# Altium PCB PCB1.PcbDoc (part 1 of 4)
Units mm, origin at the board's own origin, x right, y up, seen from the top; angles counter-clockwise.
Board outline 27.87 x 27.34 mm, 4 copper layers (Top Layer, Mid-Layer 1, Mid-Layer 2, Bottom Layer); 8 components, 11 nets, 32 pads, 618 vias.
Unrouted connection lines stored in the file: 1.
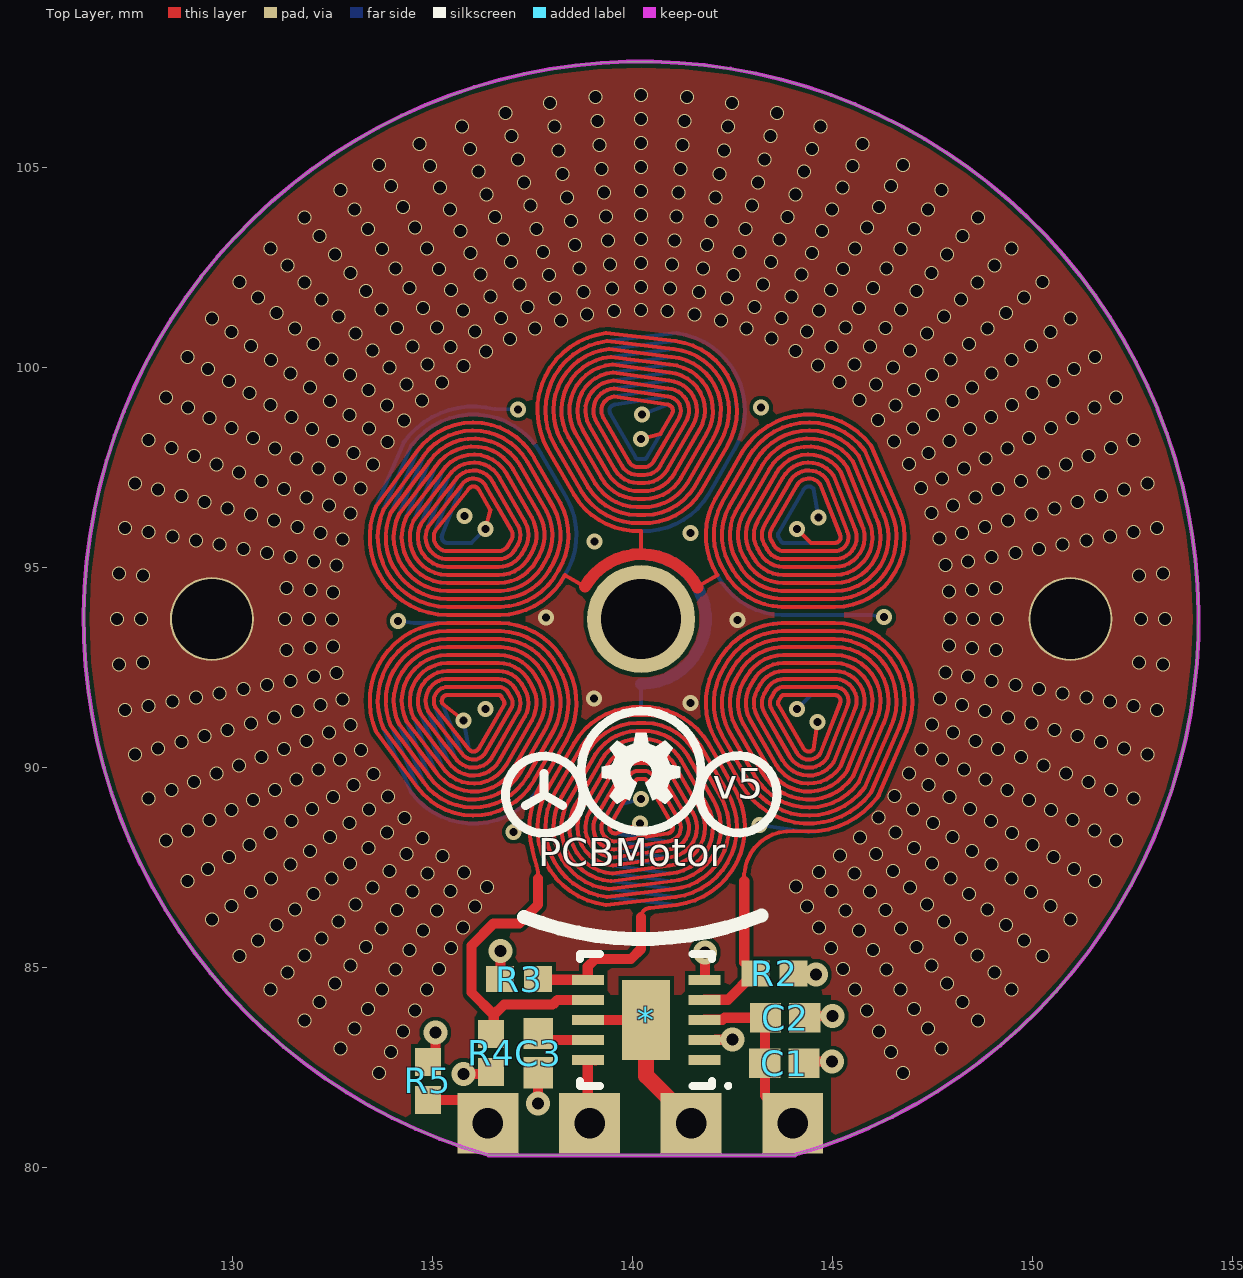
[diagram p0: Top Layer view]
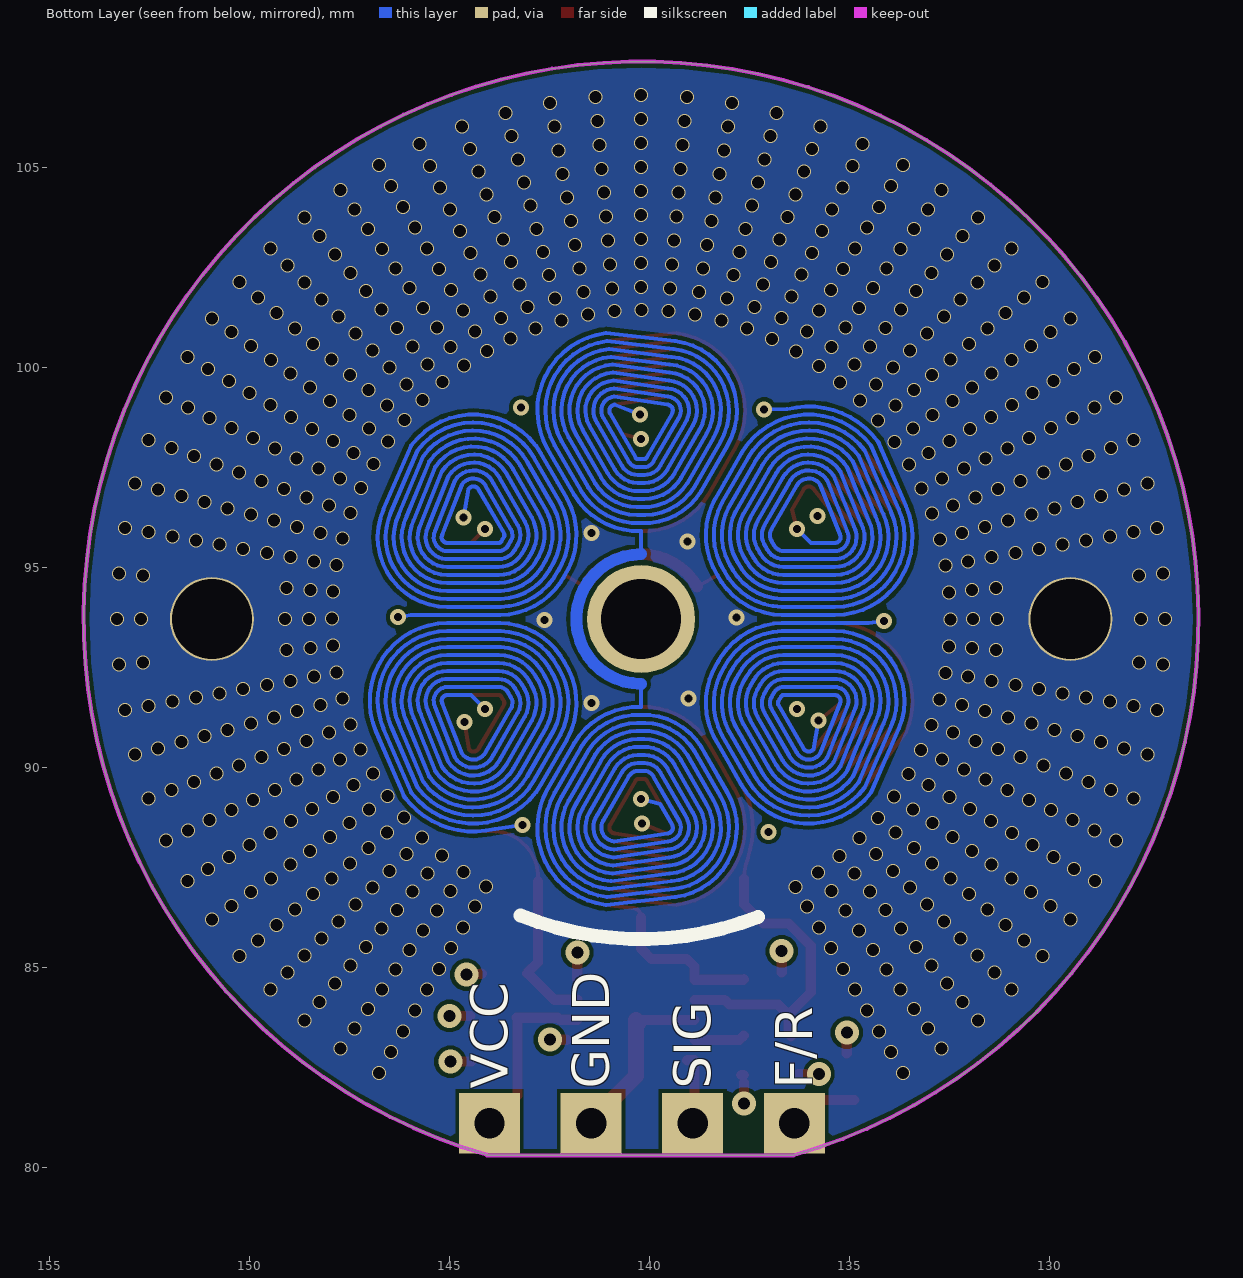
[diagram p1: Bottom Layer view, seen from below]
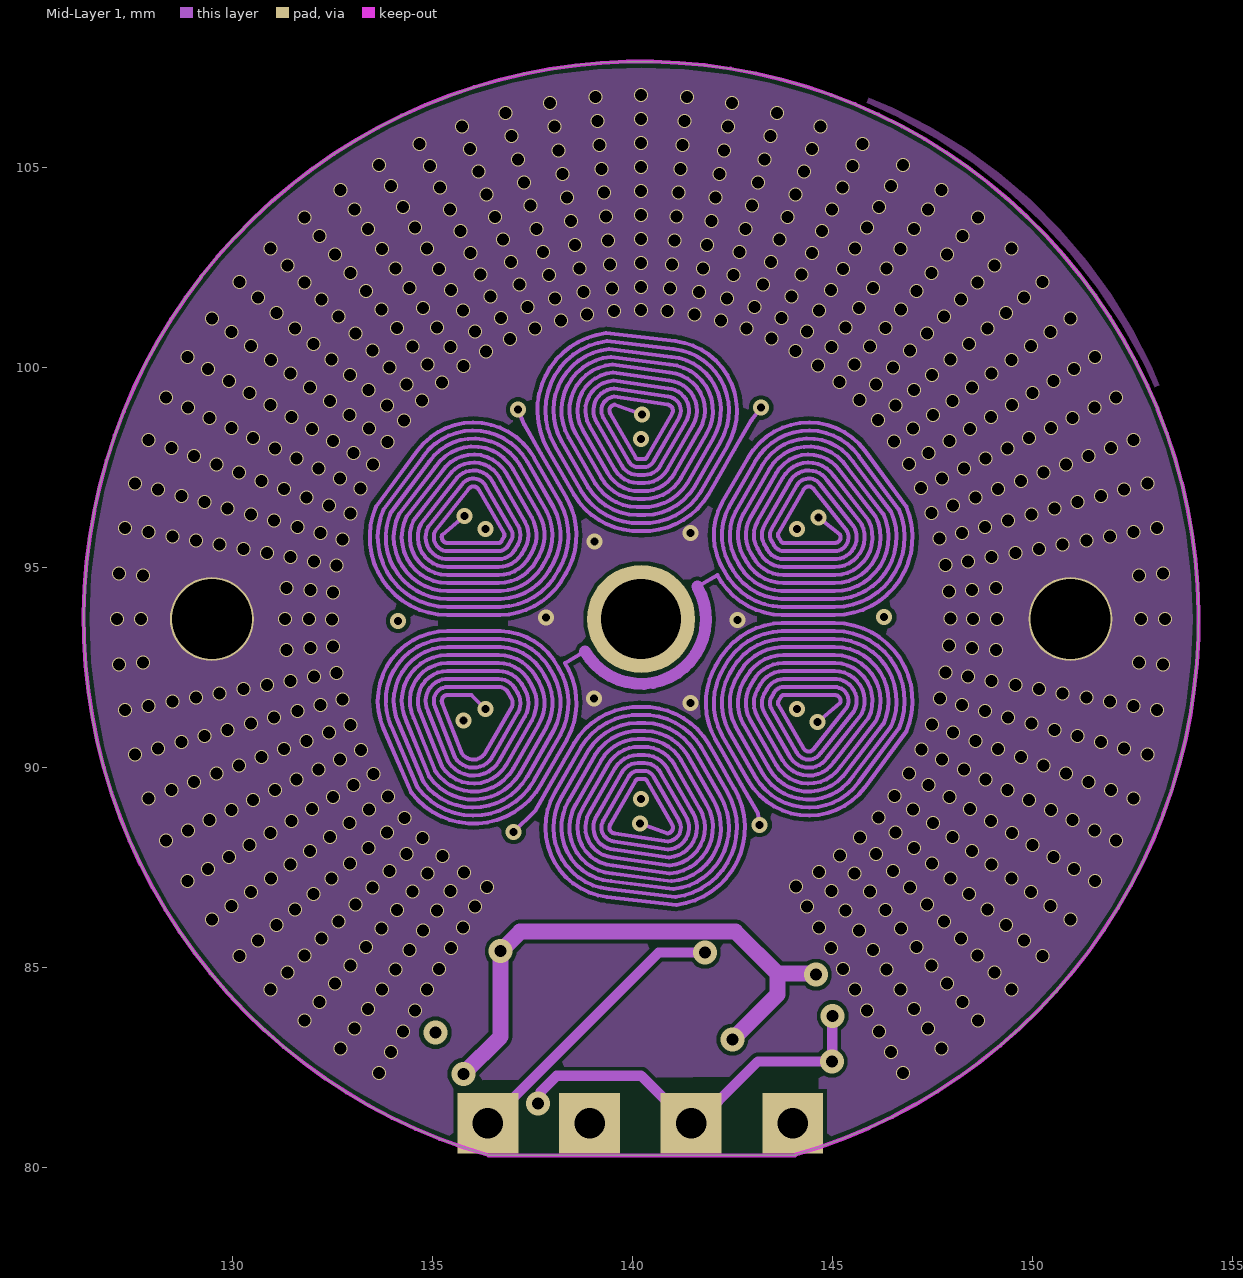
[diagram p2: Mid-Layer 1]
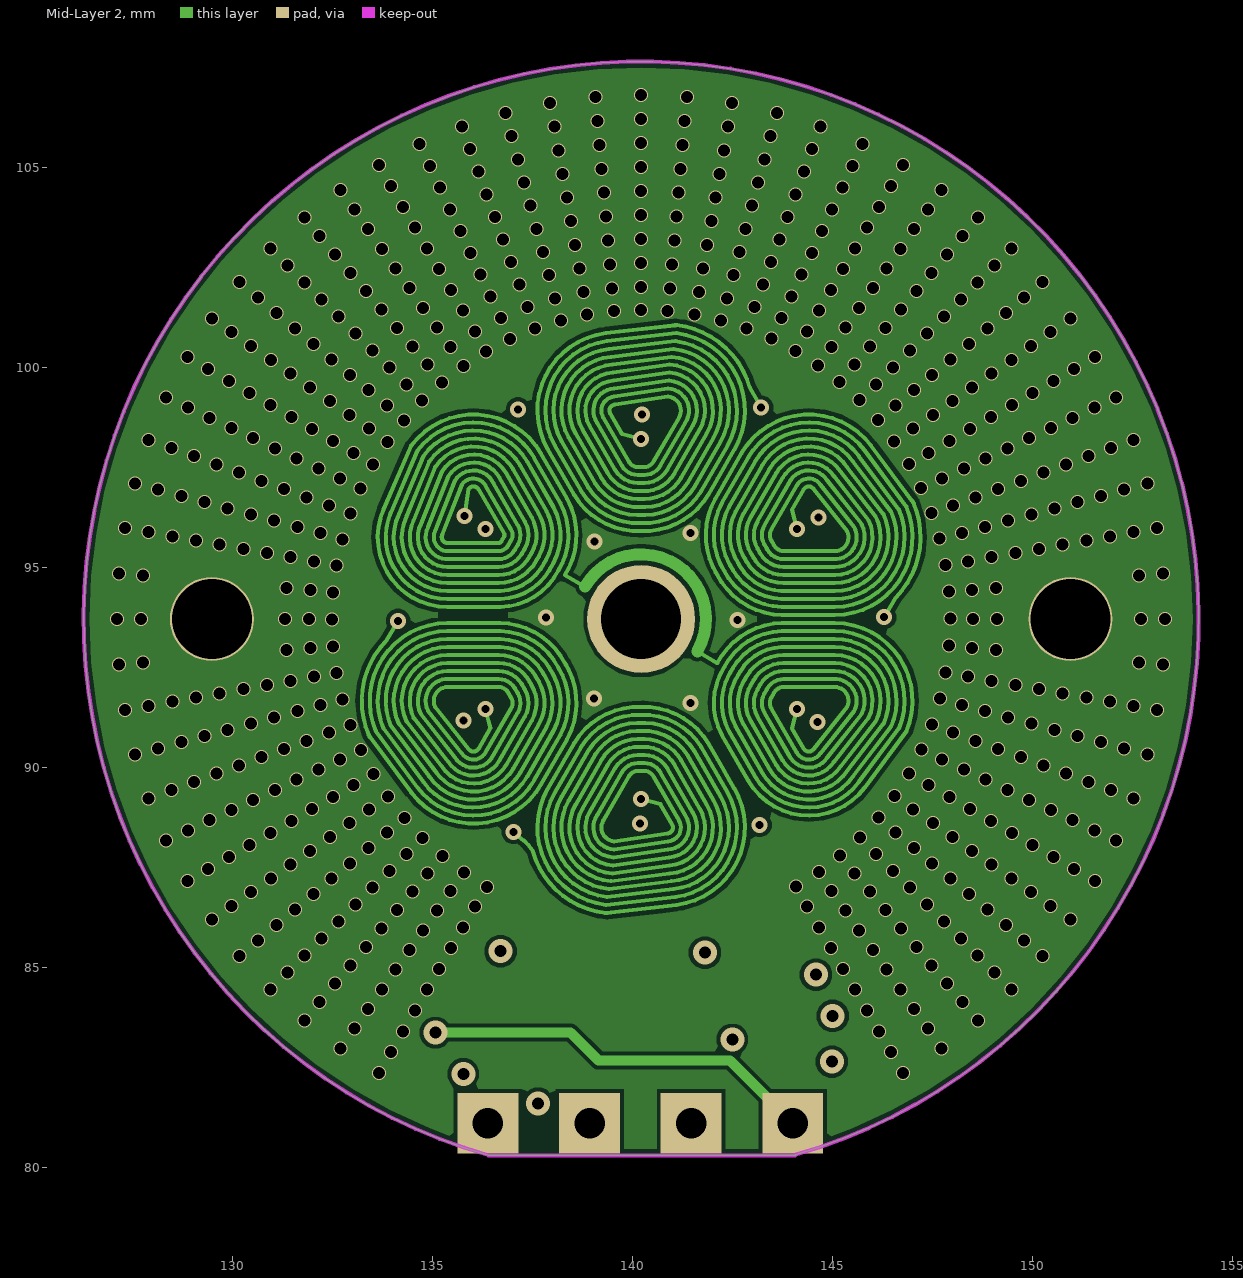
[diagram p3: Mid-Layer 2]

## Layer stack, top to bottom
Top Solder: solder mask 0.0102, Solder Resist, Dk 3.5
Top Layer: signal copper 0.0356
Dielectric 1: dielectric 0.32, FR-4, Dk 4.8
Mid-Layer 1: signal copper 0.0356
Dielectric3: dielectric 0.32, FR-4, Dk 4.8
Mid-Layer 2: signal copper 0.0356
Dielectric2: dielectric 0.32, FR-4, Dk 4.8
Bottom Layer: signal copper 0.0356
Bottom Solder: solder mask 0.0102, Solder Resist, Dk 3.5

## Board outline
136.395,80.308 cw(c140.208,93.714) 144.075,80.324 144.059,80.308

## Design rules (kind name [scope] priority, off if disabled: settings)
Clearance [All] p1: gap=0.1 ignorepadtopadclearanceinfootprint=FALSE
PolygonConnect [All] p1: connectstyle=Relief reliefconductorwidth=0.254 reliefentries=4 polygonreliefangle="90 Angle" airgapwidth=0.254
RoutingVias [All] p1: holewidth=0.711 width=1.27 viastyle="Through Hole" minholewidth=0.711 minwidth=1.27 maxholewidth=0.711 maxwidth=1.27
SolderMaskExpansion [All] p1: expansion=0 istentingtop=FALSE
Width [All] p1: maxlimit=0.254 minlimit=0.1 preferedwidth=0.254
30 further rules are at their usual default settings.

## Components (designator, comment, footprint, x,y, rotation, side; value= is the part's Value field where it differs from the comment)
* "BD67173NUX" "BD67173NUX - duplicate" 140.335,83.693 r180 top
C1 "22uF" CAPC1005X56X25ML10T15 143.79,82.607 r180 top
C2 "10nF" CAPC1005X56X25ML10T15 143.81,83.747 r180 top
C3 "1uF" CAPC1005X56X25ML10T15 137.638,82.86 r90 top
R2 "10K" RESC1005X40X25ML5T10 143.54,84.856 r0 top
R3 "10K" RESC1005X40X25ML5T10 137.16,84.709 r180 top
R4 "10K" RESC1005X40X25ML5T10 136.456,82.86 r270 top
R5 "10k" RESC1005X40X25ML5T10 134.874,82.169 r270 top

## Footprints (in the part's own frame and the unit in brackets; to place one, negate y for a bottom-side part, rotate by r counter-clockwise, add the part's x,y. Pads: shape width x height; smd on the part's side, far side on the other; paste and mask are expansions set on the pad)
"BD67173NUX - duplicate" [mm] "SON, 10-Leads, Body 3.00x3.00mm, Pitch 0.50mm, Thermal Pad 2.00x1.20mm, IPC Medium Density"
  rect 0.8x0.25 smd: 1(-1.46,1) 2(-1.46,0.5) 3(-1.46,0) 4(-1.46,-0.5) 5(-1.46,-1) 6(1.46,-1) 7(1.46,-0.5) 8(1.46,0) 9(1.46,0.5) 10(1.46,1)
  rect 1.2x2 smd: 11(0,0)
  silkscreen extent -2.1,-1.65 1.65,1.7, body extent -1.5,-1.5 1.5,1.5, height 0.6
CAPC1005X56X25ML10T15 [mm] "Chip Capacitor, 2-Leads, Body 1.00x0.50mm, IPC Low Density"
  rect 0.78x0.74 smd: 1(-0.49,0) 2(0.49,0)
  body extent -0.55,-0.3 0.55,0.3, height 0.56
RESC1005X40X25ML5T10 [mm] "Chip Resistor, 2-Leads, Body 1.05x0.55mm, IPC Low Density"
  rect 0.7x0.65 smd: 1(-0.475,0) 2(0.475,0)
  body extent -0.53,-0.28 0.53,0.28, height 0.4

## Part data
C1 C3: library part CMP-2008-02800-1, "'LMK105BJ225MV-F", Manufacturer="AVX Interconnect / Elco", Part Number=0402YC104KAT2A
C2: library part CMP-2008-02799-1, "'04025C103MAT2A", Manufacturer="AVX Interconnect / Elco", Part Number=0402YC103MAT2A
R2 R3 R4 R5: library part CMP-2002-07915-2, "'RC0402JR-0710KL", Case Code (Imperial)=0402, Case Code (Metric)=1005, Max Operating Temperature="155 degC", Min Operating Temperature="-55 degC", Package Quantity=10000, Power Rating="63 mW", Resistance="10 kohm", Tolerance=5%, Voltage Rating="50 V", Case\Package=0402, ComponentLink1Description="Manufacturer URL", ComponentLink1URL=http://www.yageo.com/, ComponentLink2Description=Datasheet, ComponentLink2URL=http://www.yageo.com/documents/recent/PYu-RC_Group_51_RoHS_L_04.pdf, DatasheetVersion="Rev. 4, 02/2016", Height="0.35 mm", Length="1 mm", Mount="Surface Mount", Mounting Technology="Surface Mount", PackageDescription="2-Pin Surface Mount Device, Body 1 x 0.5 mm", PackageReference=0402, Packaging="Tape and Reel", Pins=2, REACH SVHC="No SVHC", RoHSCompliant=true, Voltage Rating (DC)="50 V", Width="0.5 mm"

## Free pads (board coordinates)
  round 2.1 hole 2 mask+0: ""(129.476,93.714) ""(150.939,93.714)
  rect 1.524x1.524 hole 0.762: ""(136.379,81.109) ""(138.919,81.109) ""(141.459,81.109) ""(143.999,81.109)
  round 2.7 hole 2: ""(140.208,93.714)

## Via types
v1: diameter 0.35, hole 0.3, Top Layer to Bottom Layer, 585 vias
v2: diameter 0.4, hole 0.2, Top Layer to Bottom Layer, tented both sides, 24 vias
v3: diameter 0.6, hole 0.3, Top Layer to Bottom Layer, tented both sides, 9 vias

## Nets (pads, with @x,y where several pads share a name; then routed paths per layer and width w, separated by ;. In a path a pad name is that pad's centre, name@x,y a point inside that pad or via, vN(x,y) a via of type N, cw(c..) or ccw(c..) an arc to the next point about the centre after c; other vN are vias at no path point)
GND: *.8 C1.1 C2.1 C3.1 pad.@141.459,81.109 | length 11.4
  Top Layer w0.254: v3(137.632,81.604) C3.1@137.632,82.128 ; C1.1@144.451,82.651 v3(144.975,82.651) ; C2.1@144.47,83.791 v3(144.994,83.791)
  Mid-Layer 1 w0.254: v3(137.632,81.604) 137.698,81.67 137.698,81.9 138.094,82.296 140.208,82.296 pad.@140.97,81.534 ; pad.@141.207,80.731 143.127,82.651 v3(144.975,82.651) 144.985,82.66 144.985,83.781 v3(144.994,83.791)
Net*_1: *.1
Net*_2: *.2 R2.2 R3.2 R4.2 | length 16
  Top Layer w0.254: v3(135.761,82.342) R4.2@136.285,82.342 ; R3.2@136.693,84.886 v3(136.693,85.41) ; *.2@142.068,83.195 142.483,83.195 v3(142.489,83.202) ; R2.2@144.191,84.848 144.199,84.839 144.563,84.839 v3(144.579,84.823)
  Mid-Layer 1 w0.4: v3(135.761,82.342) 136.693,83.274 v3(136.693,85.41) 137.185,85.901 142.567,85.901 143.62,84.848 ; v3(142.489,83.202) 143.62,84.333 143.62,84.848 ; v3(144.579,84.823) 144.555,84.848 143.62,84.848
Net*_4: *.4 R2.1 | length 1.5
  Top Layer w0.254: *.4@141.795,84.193 141.797,84.195 142.379,84.195 143.04,84.856 R2.1@143.065,84.856
Net*_5: *.5 pad.@136.379,81.109 R5.2 | length 8.8
  Top Layer w0.254: R5.2@134.874,81.694 pad.@135.793,81.694 ; *.5@141.803,84.693 v3(141.803,85.374)
  Mid-Layer 1 w0.254: pad.@136.379,81.109 140.644,85.374 v3(141.803,85.374)
Net*_6: *.6 R3.1 | length 1.2
  Top Layer w0.254: R3.1@137.635,84.709 137.649,84.695 138.873,84.695 *.6@138.875,84.693
Net*_7: *.7 R4.1 | length 3.1
  Top Layer w0.254: R4.1@136.462,83.284 136.525,83.347 136.525,83.82 136.779,84.074 137.996,84.074 138.115,84.193 *.7@138.875,84.193
Net*_9: *.9 C3.2 | length 1.3
  Top Layer w0.254: C3.2@137.644,83.299 137.75,83.193 *.9@138.875,83.193
Net*_10: *.10 pad.@138.919,81.109 | length 1.6
  Top Layer w0.254: pad.@138.684,81.153 138.875,81.344 *.10@138.875,82.693
NetD?_1: 
VCC: *.3 C1.2 C2.2 pad.@143.999,81.109 R5.1 | length 14.9
  Top Layer w0.254: R5.1@135.066,82.851 v3(135.066,83.375) ; *.3@141.795,83.693 141.797,83.695 142.237,83.695 142.29,83.747 C2.2@143.32,83.747 143.3,83.728 C1.2@143.3,82.607 143.3,81.807 pad.@143.999,81.109
  Mid-Layer 2 w0.254: v3(135.066,83.375) 138.446,83.375 139.146,82.675 142.433,82.675 pad.@143.999,81.109
pads on no net: *.11